# Allegro board MiniACDC-12V-V0101.brd
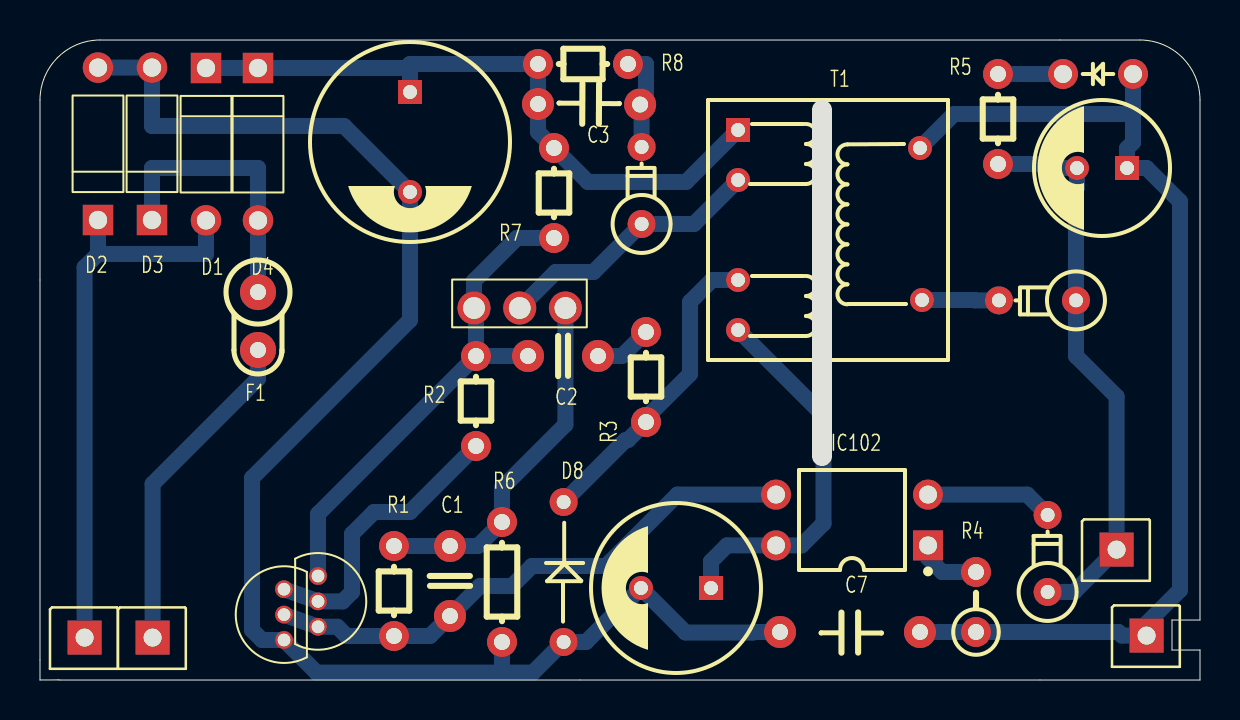
[diagram p0: board, top side]
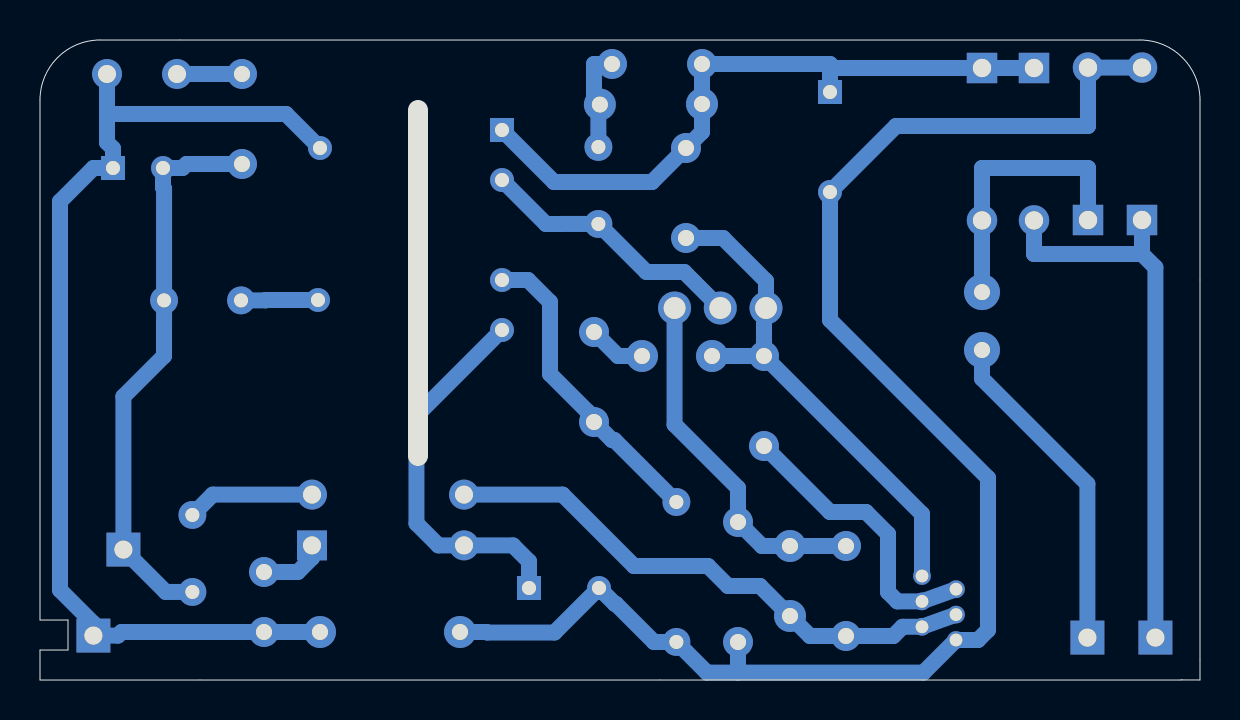
[diagram p1: board, bottom side, seen from below]

Outline 58 x 32 mm; copper layers: TOP, BOTTOM. Coordinates in mm from the lower left corner of the outline.
Outline path: 39.1,28.5 39.1,11.2 ; 0,29 0,0 0.9,0.01 arc(0.95,0) 1,0 58,0 58,1.5 56.6,1.5 56.6,3 58,3 58,29 arc(57.12,31.12) 55,32 3,32 arc(0.88,31.12) 0,29

## Placement (name value [footprint] x y rotation side)
C1  102  [RAD3_5D0_8]  20.5 3.2 90 top
C2  103  [RAD3_5D0_8]  24.4 16.2 0 top
C3  102/1000V  [RAD200]  24.9 28.8 359.7 top
C4  4.7uF/450V  [ELE10B5D0_8]  18.5 26.9 270 top
C5  470uF/25V  [ELE8_5B3_5D0_7]  31.8 4.6 180 top
C6  470uF/25V  [ELE6_5B2_5D0_7]  53.1 25.6 180 top
C7  222/2000V  [RAD7D0_8]  44 2.4 180 top
D1  1N4007  [DIO300]  8.3 30.6 180 top
D2  1N4007  [DIO300]  2.9 23 0 top
D3  1N4007  [DIO300]  5.6 23 0 top
D4  1N4007  [DIO300]  10.9 30.6 180 top
D5  1N4148  [DIODE-B3_85D0_7]  30.1 22.8 90 top
D6  RED  [LED-B3_5AK]  52.9 30.3 180 top
D7  SR210  [DIODE-B3_85D0_7]  51.8 19 180 top
D8  1N4148  [DIODE-B7D0_7AK]  26.2 1.9 90 top
D9  1N4148  [DIODE-B3_85D0_7]  50.4 4.4 90 top
F1  FUSE  [AXIAL2_9UP]  10.9 14.9 90 top
IC102  JC617  [DIP4]  40.6 8 90 top
Q1  9014  [TO92-NPN-EBC]  12.2 2 180 top
Q3  9015  [TO92-NPN-EBC]  13.9 5.2 0 top
Q4  1N60A  [TO251AA]  21.7 18.6 0 top
R1  2.2M  [AXIAL4_5D0_8]  17.7 2.2 90 top
R2  470R  [AXIAL4_5D0_8]  21.8 11.7 90 top
R3  1.5K  [AXIAL4_5D0_8]  30.3 12.9 90 top
R4  330R  [AXIAL3D0_8UP]  46.8 5.4 270 top
R5  1.5K  [AXIAL4_5D0_8]  47.9 25.8 90 top
R6  1  [AXIAL6D0_8]  23.1 1.9 90 top
R7  1M  [AXIAL4_5D0_8]  25.7 22.1 90 top
R8  100K  [AXIAL4_5D0_8]  29.4 30.8 180 top
T1  TG-EE 16,000A-4KV-H XP  [TRANSACDC02]  39.4 22.5 270 top
TP1  TEST POINT  [HDR_S1_7D0_9X1]  2.2 2.1 0 top
TP2  TEST POINT  [HDR_S1_7D0_9X1]  5.6 2.1 0 top
TP3  TEST POINT  [HDR_S1_7D0_9X1]  53.8 6.5 0 top
TP4  TEST POINT  [HDR_S1_7D0_9X1]  55.3 2.2 0 top

## Library data of the parts
C1-C3 C7 = CAP NP
C4-C6 = CAPACITOR POL
D1-D4 = DIODE
D5 D7-D9 = DIODE_0
D6 = LED_1
F1 = FUSE
IC102 = Pro62B2.TMP_TLP521_48: Tolerance: RichardLC
Q1 = NPN BCE_1
Q3 = PNP BCE_0
Q4 = MOSFET N
R1-R8 = RESISTOR
T1 = TRAN_ACDC-01_0
TP1-TP4 = TEST POINT: Tolerance: RichardLC; User Part Number: pn

## Footprints (pads in the part's own frame, mm; a bottom-side part is the same pattern mirrored in y, then rotated)
AXIAL2_9UP
  round 1.8 hole 0.8: 1(1.6,0) 2(4.496,0)
AXIAL3D0_8UP
  round 1.5 hole 0.8: 1(0,0) 2(3,0)
AXIAL4_5D0_8
  round 1.5 hole 0.8: 1(0,0) 2(4.5,0)
AXIAL6D0_8
  round 1.5 hole 0.8: 1(0,0) 2(6,0)
DIO300
  rect 1.524x1.524 hole 0.914: 1(0,0)
  round 1.524 hole 0.914: 2(0,7.62)
DIODE-B3_85D0_7
  round 1.4 hole 0.7: A(0.002,0.019) K(3.852,0.019)
DIODE-B7D0_7AK
  round 1.4 hole 0.7: A(0.002,0.019) K(7,0.019)
DIP4
  rect 1.5x1.5 hole 0.9: 1(-1.27,-3.8)
  round 1.5 hole 0.9: 2(1.27,-3.8) 3(1.27,3.8) 4(-1.27,3.8)
ELE6_5B2_5D0_7
  rect 1.2x1.2 hole 0.7: 1(-1.25,0)
  round 1.2 hole 0.7: 2(1.25,0)
ELE8_5B3_5D0_7
  rect 1.2x1.2 hole 0.7: 1(-1.75,0)
  round 1.2 hole 0.7: 2(1.75,0)
ELE10B5D0_8
  rect 1.2x1.2 hole 0.7: 1(-2.5,0)
  round 1.2 hole 0.7: 2(2.5,0)
HDR_S1_7D0_9X1
  rect 1.7x1.7 hole 0.9: 1(0.03,0.02)
LED-B3_5AK
  round 1.5 hole 0.9: A(-1.75,0) K(1.75,0)
RAD3_5D0_8
  round 1.6 hole 0.8: 1(0,0) 2(3.5,0)
RAD7D0_8
  round 1.6 hole 0.8: 1(0,0) 2(7,0)
RAD200
  round 1.6 hole 0.8: 1(0,0) 2(5.105,0)
TO92-NPN-EBC
  round 0.889 hole 0.635: B(0,-1.27) C(0,-2.54) E(0,0)
TO251AA
  round 1.651 hole 1.092: 1(0,0) 2(2.286,0) 3(4.572,0)
TRANSACDC02
  rect 1.2x1.2 hole 0.7: 1(-5,-4.5)
  round 1.2 hole 0.7: 2(-2.5,-4.5) 3(2.5,-4.5) 4(5,-4.5) 5(3.5,4.7) 6(-4.1,4.6)

## Nets
GND: C6.2 D7.A D9.A R5.1 TP3.1
GND_SIGNAL: C4.2 C5.2 C7.2 D2.2(A) D3.2(A) D8.A Q1.E R6.1
N00729: C3.1 C4.1 D1.1(K) D4.1(K) R7.2 R8.2 T1.1
N00757: D1.2(A) D2.1(K) TP1.1
N00761: F1.1 TP2.1
N02513: C6.1 C7.1 D6.A(ANODE) R4.2 T1.6 TP4.1
N05715: D3.1(K) D4.2(A) F1.2
N17993: C3.2 D5.K R8.1
N18131: D5.A Q4.2(DRAIN) T1.2
N18479: D6.K(CATHODE) R5.2
N18849: C2.1 Q3.E Q4.1(GATE) R2.2 R7.1
N19149: C1.1 IC102.3 Q1.B Q3.C R1.1
N19237: C5.1 IC102.4 T1.4
N19244: D8.K R3.1 T1.3
N19474: C2.2 R3.2
N19641: C1.2 Q4.3(SOURCE) R1.2 R6.2
N19732: Q1.C Q3.B R2.1
N19893: IC102.1 R4.1
N19992: D9.K IC102.2
N092384: D7.K T1.5

## Via types
v1: diameter 0.812, hole 0.3, TOP to BOTTOM, 1 via

## Routing (per net, layer and track width the routed paths; a pad name or vN(x,y) marks a point on that pad's centre or on a via; arc(x,y) is an arc through that point)
GND: length 28.3
  BOTTOM w0.8: R5.1 50.67,25.8 50.87,25.6 C6.2 51.85,24.62 51.8,24.57 D7.A 51.8,17.75 51.8,17.75 51.8,16.2 53.83,14.17 TP3.1 51.71,4.4 D9.A
GND_SIGNAL: length 76.6
  BOTTOM w0.8: 23.1,0.37 13.83,0.37 Q1.E 11.1,2 10.6,2.5 10.6,10.1 18.5,18 C4.2 15.2,27.7 5.6,27.7 D3.2 D2.2 ; 23.1,0.37 R6.1 ; 23.1,0.37 24.65,0.37 D8.A 26.18,1.9 27.3,1.9 29.2,3.8 29.25,3.8 C5.2 32.27,2.38 35.65,2.38 35.67,2.4 C7.2
N00729: length 33.5
  BOTTOM w0.8: 18.5,30.6 D4.1 D1.1 ; 18.5,30.6 18.5,30.8 R8.2 C3.1 24.9,27.4 R7.2 27.4,24.9 32.3,24.9 T1.1 ; 18.5,30.6 C4.1
N00757: length 28.2
  BOTTOM w0.8: D1.2 8.3,21.3 2.9,21.3 ; 2.9,21.3 D2.1 ; 2.9,21.3 2.23,20.63 TP1.1
N00761: length 16.6
  BOTTOM w0.8: F1.1 10.9,15.07 5.63,9.8 TP2.1
N02513: length 53.4
  BOTTOM w0.8: C7.1 R4.2 53.92,2.4 54.1,2.22 TP4.1 55.33,2.83 57,4.5 57,23.93 55.33,25.6 C6.1 54.35,26.58 54.65,26.88 54.65,28.2 ; 54.65,28.2 54.55,28.3 45.7,28.3 T1.6 ; 54.65,28.2 D6.A
N05715: length 14.1
  BOTTOM w0.8: F1.2 D4.2 10.9,25.6 5.6,25.6 D3.1
N17993: length 5.3
  BOTTOM w0.8: v1(30.08,28.77) 30.3,28.77 30.3,30.8 R8.1 ; v1(30.08,28.77) 30.08,26.65 ; v1(30.08,28.77) C3.2
N18131: length 13.6
  BOTTOM w0.8: T1.2 32.7,22.8 32,22.8 32,22.8 30.08,22.8 27.68,20.4 25.79,20.4 Q4.2
N18479: length 3.2
  BOTTOM w0.8: D6.K R5.2
N18849: length 25.6
  BOTTOM w0.8: C2.1 R2.2 ; R2.2 21.8,18.5 Q4.1 21.7,19.95 23.85,22.1 R7.1 ; R2.2 13.9,8.3 Q3.E
N19149: length 27.8
  BOTTOM w0.8: IC102.3 31.87,9.27 28.3,5.7 24.6,5.7 23.6,4.7 22,4.7 C1.1 19.5,2.2 R1.1 15.33,2.2 14.87,2.66 Q3.C Q1.B
N19237: length 19.2
  BOTTOM w0.8: T1.4 39.18,13.22 39.18,7.83 38.08,6.73 IC102.4 34.35,6.73 33.55,5.93 C5.1
N19244: length 15.5
  BOTTOM w0.8: T1.3 33.6,20 32.5,18.9 32.5,15.3 30.6,13.4 30.6,13.2 R3.1 29.4,12 29.28,12 D8.K
N19474: length 2.9
  BOTTOM w0.8: C2.2 29.1,16.2 R3.2
N19641: length 17.9
  BOTTOM w0.8: R1.2 C1.2 21.9,6.7 R6.2 23.1,9.6 26.27,12.77 Q4.3
N19732: length 14.6
  BOTTOM w0.8: R2.1 18.5,8.4 16.7,8.4 15.6,7.3 15.6,4.4 15.13,3.93 Q3.B Q1.C
N19893: length 3.3
  BOTTOM w0.8: R4.1 45.11,5.4 44.4,6.11 IC102.1
N19992: length 6.4
  BOTTOM w0.8: IC102.2 49.36,9.27 D9.K
N092384: length 3.9
  BOTTOM w0.8: D7.K 46.72,18.98 46.7,19 T1.5
